# Altium PCB Sample_FPC_v1.PcbDoc
Units mm, origin at the board's own origin, x right, y up, seen from the top; angles counter-clockwise.
Board outline 5.42 x 71.23 mm, 2 copper layers (Top Layer, Bottom Layer); 2 components, 5 nets, 12 pads, 0 vias.
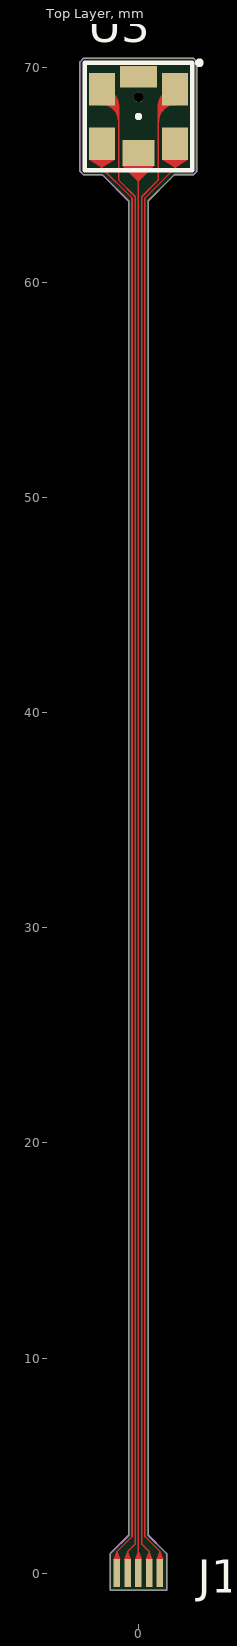
[diagram p0: Top Layer view]
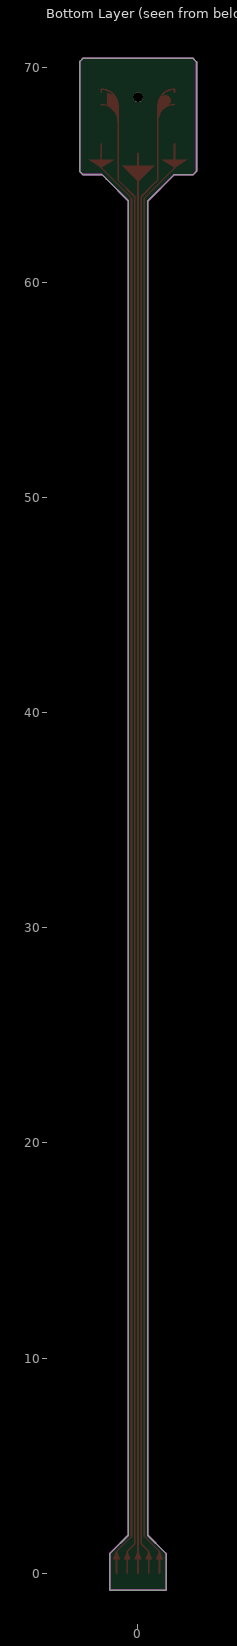
[diagram p1: Bottom Layer view, seen from below]

## Layer stack, top to bottom
Top Solder: solder mask 0.0102, Solder Resist, Dk 3.5
Top Layer: signal copper 0.0356
Dielectric 1: dielectric 0.32, FR-4, Dk 4.8
Bottom Layer: signal copper 0.0356
Bottom Solder: solder mask 0.0102, Solder Resist, Dk 3.5

## Board outline
-1.305,-0.792 -1.305,0.908 -1.238,0.976 -0.451,1.763 -0.451,63.795 -1.672,65.017 -2.558,65.017 -2.722,65.181 -2.722,70.269 -2.556,70.435 2.558,70.435 2.701,70.293 2.701,65.166 2.566,65.032 1.677,65.032 1.466,64.821 0.452,63.806 0.452,1.762 1.238,0.976 1.31,0.904 1.31,-0.792

## Design rules (kind name [scope] priority, off if disabled: settings)
Clearance [All] p1: gap=0.075 ignorepadtopadclearanceinfootprint=FALSE
PolygonConnect [All] p1: connectstyle=Relief reliefconductorwidth=0.254 reliefentries=4 polygonreliefangle="90 Angle" airgapwidth=0.254
RoutingVias [All] p1: holewidth=0.2 width=0.4 viastyle="Through Hole" minholewidth=0.2 minwidth=0.4 maxholewidth=0.2 maxwidth=0.4
SolderMaskExpansion [All] p1: expansion=0.102 istentingtop=FALSE
Width [All] p1: maxlimit=1.27 minlimit=0.075 preferedwidth=0.075
30 further rules are at their usual default settings.

## Components (designator, comment, footprint, x,y, rotation, side; value= is the part's Value field where it differs from the comment)
J1 "FPC0.5-5P-line" FPC0.5-5P-Line 0,-0.043 r180 top
U3 "FMAMSDXX005WCSC3" FMA_MICROFORCE_6 1.7,69 r270 top

## Footprints (in the part's own frame and the unit in brackets; to place one, negate y for a bottom-side part, rotate by r counter-clockwise, add the part's x,y. Pads: shape width x height; smd on the part's side, far side on the other; paste and mask are expansions set on the pad)
FMA_MICROFORCE_6 [mm]
  round 0.45 hole 0.45 unplated: 0(0.38,-1.7)
  rect 1.5x1.2 smd: 1(0,0) 2(2.54,0) 3(2.54,-3.4) 4(0,-3.4)
  rect 1.2x1.5 smd: 5(2.97,-1.7)
  rect 1x1.73 smd: 6(-0.59,-1.7)
  silkscreen extent -1.3,-4.2 3.77,1.2, body extent -1.23,-4.2 3.77,0.8, height 2.55
FPC0.5-5P-Line [mm]
  rect 0.3x1.3 smd: 1(-1,-0.043) 2(-0.5,-0.043) 3(0,-0.043) 4(0.5,-0.043) 5(1,-0.043)

## Part data
U3: "Force Range: 5N  / Output: SPI  / FMA Series Force Sensor, compensated/amplified, mechanically  / coupled, sphere contact element, sensor short and open  / diagnostics, 5 N force range, compression force type, SPI digital  / output, 20% to 80% transfer function, 3.3 V ±10% supply voltage"

## Nets (pads, with @x,y where several pads share a name; then routed paths per layer and width w, separated by ;. In a path a pad name is that pad's centre, name@x,y a point inside that pad or via, vN(x,y) a via of type N, cw(c..) or ccw(c..) an arc to the next point about the centre after c; other vN are vias at no path point)
GND: J1.5 U3.3 | length 67.3
  Top Layer w0.075: U3.3 -1.7,65.338 -0.3,63.938 -0.3,63.462 -0.3,1.7 -1,1 J1.5
MISO: J1.3 U3.5 | length 66
  Top Layer w0.075: J1.3 U3.5
SCLK: J1.4 U3.4 | length 71.3
  Top Layer w0.075: U3.4@-1.7,68.85 U3.4 cw(c-1.7,68.225) -0.925,68.225 -0.925,64.775 -0.15,64 -0.15,1.35 -0.5,1 J1.4 ; U3.4@-1.692,68.289 cw(c-1.692,67.513) -0.916,67.513
SS: J1.1 U3.2 | length 67.3
  Top Layer w0.075: J1.1 1,1 0.3,1.7 0.3,63.663 0.3,63.938 1.7,65.338 U3.2
VCC: J1.2 U3.1 | length 71.3
  Top Layer w0.075: J1.2 0.5,1 0.15,1.35 0.15,64 0.926,64.776 0.926,68.226 cw(c1.7,68.226) U3.1 U3.1@1.7,68.85 ; 0.932,67.513 cw(c1.706,67.513) U3.1@1.706,68.288
pads on no net: U3.0 U3.6

## Keep-outs
Keep-Out Layer:
  lines w0.075: -2.722,65.181 -2.722,70.269 -2.556,70.435 2.558,70.435 2.701,70.293 2.701,65.166 2.566,65.032 1.677,65.032 1.466,64.821 0.452,63.806 0.452,1.762 1.238,0.976 1.31,0.904 1.31,-0.792 -1.305,-0.792 -1.305,0.908 -1.238,0.976 -0.451,1.763 -0.451,63.626 -0.451,63.795 -1.672,65.017 -2.558,65.017 -2.722,65.181

## Other copper
Top Layer:
  region net VCC: 0.93,67.764 0.93,68.276 cw(c1.48,68.276) 1.48,68.825 ccw(c1.48,68.768) 1.422,68.768 1.422,68.291
  region net SCLK: -0.956,67.858 ccw(c-0.956,67.889) -0.925,67.889 -0.925,68.362 ccw(c-1.278,68.362) -1.278,68.715 ccw(c-1.278,68.473) -1.52,68.473 -1.52,68.401
  region net MISO: -0.745,65.434 -0.004,64.692 0.742,65.435
  region net SS: 2.3,65.711 1.104,65.712 1.7,65.338
  region net GND: -1.1,65.711 -2.297,65.712 -1.7,65.338
  region net GND: -1.15,0.65 -1.03,0.97 -1.03,0.64
  region net MISO: 0.15,0.65 0.03,0.965 0.03,0.635
  region net GND: -0.85,0.65 -0.97,0.965 -0.97,0.635
  region net SCLK: -0.35,0.65 -0.47,0.965 -0.47,0.635
  region net VCC: 0.65,0.65 0.53,0.965 0.53,0.635
  region net SS: 1.15,0.65 1.03,0.965 1.03,0.635
  region net SS: 0.85,0.65 0.97,0.97 0.97,0.64
  region net VCC: 0.35,0.65 0.47,0.97 0.47,0.64
  region net SCLK: -0.65,0.65 -0.53,0.97 -0.53,0.64
  region net MISO: -0.15,0.65 -0.03,0.97 -0.03,0.64